# Altium PCB Boost_Conv_V1.0PCB.PcbDoc (part 3 of 3)
Units mm, origin at the board's own origin, x right, y up, seen from the top; angles counter-clockwise.
Board outline 213.5 x 150 mm, 2 copper layers (Top Layer, Bottom Layer); 53 components, 42 nets, 190 pads, 3434 vias.
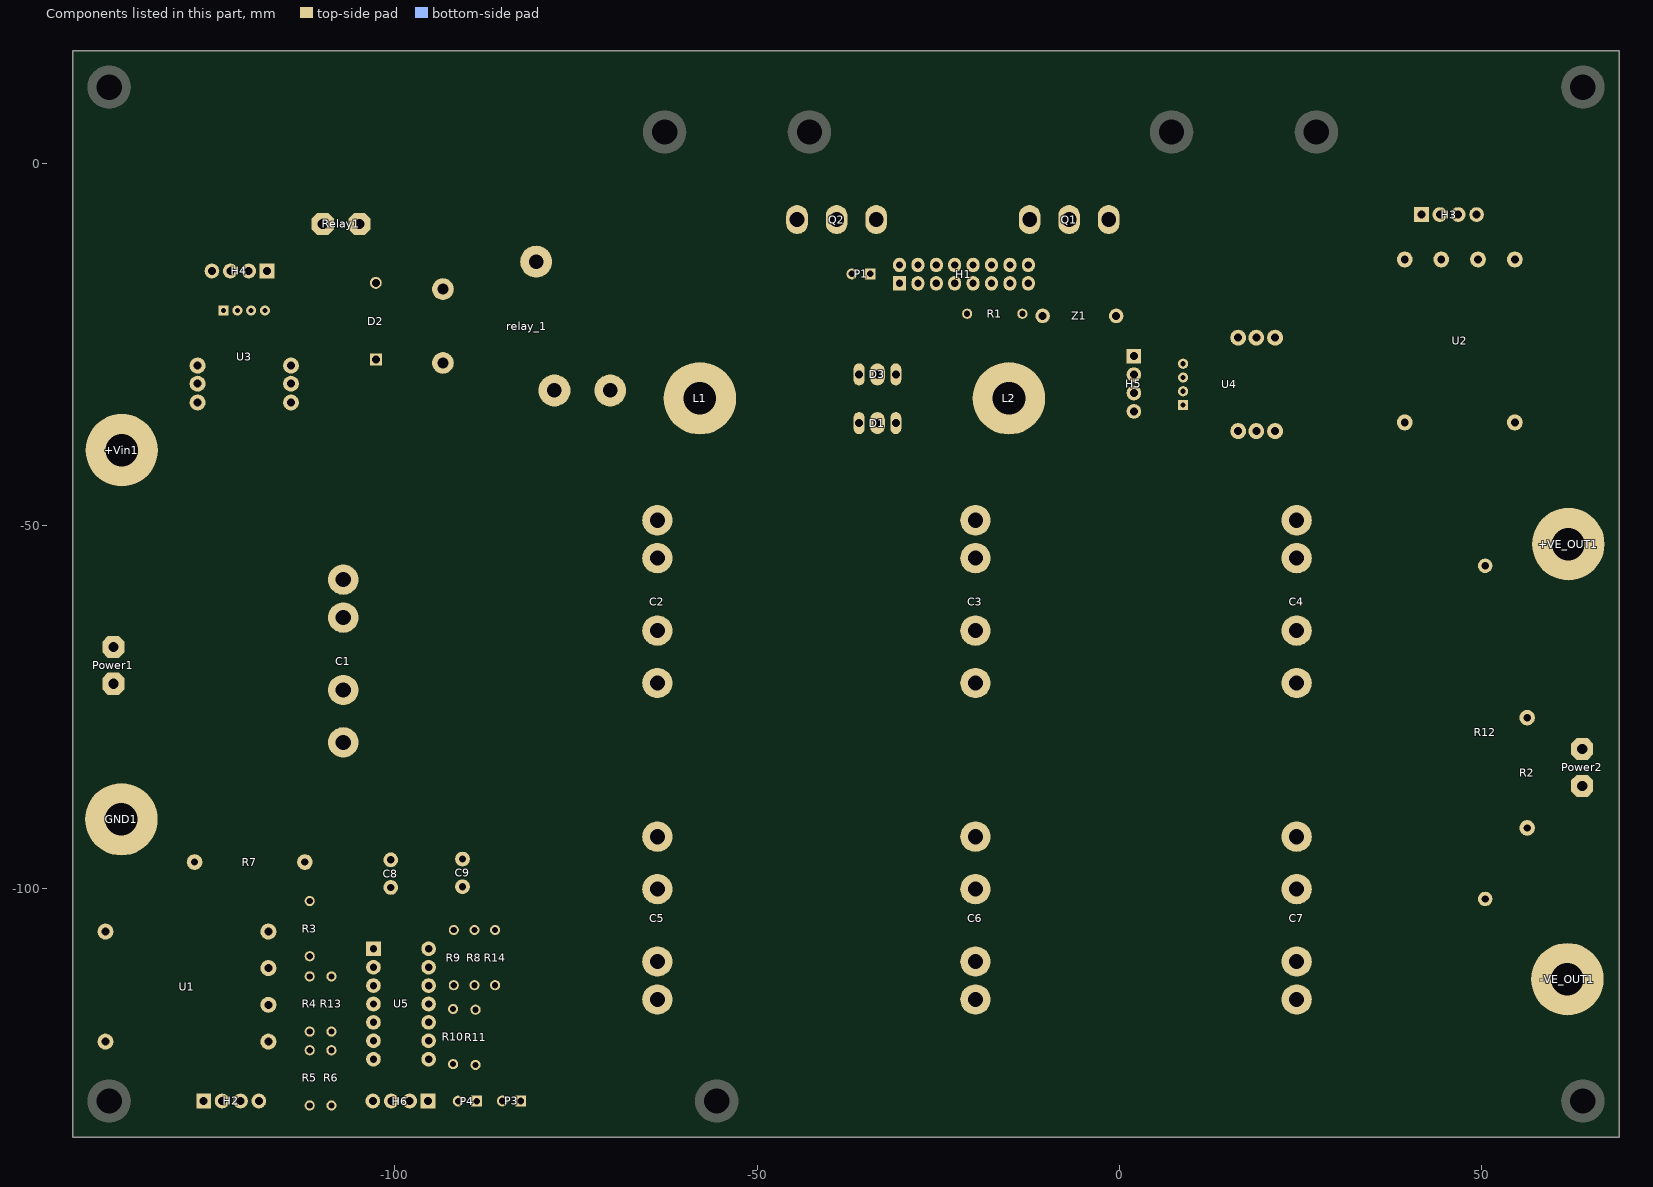
[diagram p3: the components of this part, seen from the top]

## Polygon pours and split planes (outlines as drawn) (continued)
NetC1_1 on Top Layer "Top Layer-NetC1_1" (solid, remove dead copper, pour order 43): -64.64,-33.803 -61.64,-36.803 -51.378,-36.803 -48.398,-33.903 -48.454,-25.303 -51.474,-22.326 -80.752,-22.541 -86.574,-29.422 -86.574,-31.703 -89.574,-34.703 -105.074,-34.703 -120.274,-49.903 -120.274,-62.703 -117.274,-65.703 -88.174,-65.703 -85.174,-62.703 -85.174,-42.203 -79.874,-36.903 -77.674,-36.903 -74.674,-33.903 -74.674,-28.503 -72.674,-26.503 -66.64,-26.503 -64.64,-28.503
Emitter on Top Layer "Top Layer-Emitter" (solid, remove dead copper, pour order 41): -75.675,-61.703 -78.682,-64.703 -78.686,-66.403 -81.693,-69.403 -128.074,-69.403 -130.174,-71.503 -141.092,-71.503 -143.174,-73.503 -143.174,-93.403 -141.092,-95.403 -134.274,-95.403 -128.474,-89.603 -81.874,-89.603 -78.748,-92.603 -78.767,-100.403 -75.774,-103.403 45.526,-103.403 48.526,-106.403 48.526,-117.703 51.526,-120.703 64.626,-120.703 67.626,-117.703 67.626,-88.203 64.626,-85.203 48.626,-85.203 45.626,-82.203 45.626,-64.703 42.626,-61.703
NetR7_1 on Top Layer "NETR7_1_L01_P010" (solid, remove dead copper, pour order 10): -140.092,-101.103 -143.092,-104.103 -143.092,-109.503 -139.474,-112.503 -129.774,-112.503 -120.074,-102.803 -120.074,-95.803 -123.074,-92.803 -127.074,-92.803 -135.374,-101.103
IP+in on Top Layer "IP+IN_L01_P007" (solid, remove dead copper, pour order 7): -143.092,-62.703 -140.092,-65.703 -127.774,-65.703 -124.774,-62.703 -124.774,-27.403 -127.374,-24.803 -140.092,-24.803 -143.092,-27.803
Cathode on Top Layer "CATHODE_L01_P005" (solid, remove dead copper, pour order 5): 45.326,-122.103 42.326,-125.103 -75.674,-125.103 -78.674,-122.103 -78.674,-110.003 -75.674,-107.003 42.326,-107.003 45.326,-110.003
Cathode on Top Layer "Top Layer-Cathode" (solid, remove dead copper, pour order 3): 27.926,-56.103 24.926,-59.103 -75.674,-59.103 -78.674,-56.103 -78.674,-42.465 -75.662,-39.453 9.726,-39.453 14.326,-34.853 24.926,-34.892 27.926,-37.903
Collector on Bottom Layer "Bottom Layer-Collector" (solid, remove dead copper, pour order 40): -5.41,-8.23 -8.357,-6.833 -8.611,-10.82 -8.611,-23.94 -9.574,-24.903 -17.774,-24.903 -21.274,-28.403 -21.274,-36.603 -18.274,-39.603 -9.774,-39.603 -4.687,-34.517
Emitter on Bottom Layer "EMITTER_L02_P038" (solid, remove dead copper, pour order 38): -143.074,-118.803 -141.074,-120.803 -127.774,-120.803 -124.774,-117.803 -124.774,-89.203 -128.774,-85.203 -139.474,-85.203 -143.074,-88.203
Cathode on Bottom Layer "Bottom Layer-Cathode" (solid, remove dead copper, pour order 54): -36.195,-105.436 -34.706,-106.934 46.944,-107.626 36.689,-117.881 -39.274,-117.703 -71.674,-117.703 -74.702,-114.704 -74.746,-110.003 -71.674,-107.003 -56.574,-107.003 -52.42,-102.997 -52.334,-61.603 -55.328,-58.603 -75.674,-58.603 -78.674,-56.103 -78.674,-42.403 -75.674,-39.31 -38.774,-39.396 -35.793,-42.403
IP+in on Bottom Layer "IP+IN_L02_P052" (solid, remove dead copper, pour order 52): -143.092,-62.703 -140.092,-65.703 -127.774,-65.703 -124.774,-62.703 -124.774,-27.403 -127.374,-24.803 -140.092,-24.803 -143.092,-27.803
Emitter on Bottom Layer "Bottom Layer-Emitter" (solid, remove dead copper, pour order 51): -38.915,-19.482 -37.343,-21.057 -25.719,-21.057 -25.732,-21.081 -23.927,-19.103 -12.48,-19.103 cw(c-12.479,-19.732) -11.851,-19.732 -11.851,-19.916 ccw(c-11.774,-19.916) -11.774,-19.992 -11.774,-21.855 cw(c-12.274,-21.855) -12.274,-22.355 -18.578,-22.355 -23.927,-27.703 -23.927,-60.903 29.318,-60.903 29.473,-35.093 33.633,-33.947 cw(c31.462,-36.457) 34.697,-37.195 45.126,-48.603 45.426,-59.103 45.426,-100.703 42.426,-103.703 -24.974,-103.703 -27.974,-100.703 -27.974,-26.294 -28.005,-26.219 ccw(c-28.97,-26.219) -28.97,-25.254 -42.626,-25.272 cw(c-42.626,-24.275) -43.623,-24.276 -43.623,-24.273 -43.583,-10.614 -35.949,-10.621 -35.91,-12.162 -38.91,-14.761
Emitter on Bottom Layer "EMITTER_L02_P049" (solid, remove dead copper, pour order 49): -0.976,0 0,-0.976 0,-4.26 -35.052,-4.312 -35.052,-0.976 -35.028,-0.976 -34.052,0
Emitter on Bottom Layer "Bottom Layer-Emitter 1" (solid, remove dead copper, pour order 31): -56.274,-100.403 -59.274,-103.362 -82.173,-103.045 -85.174,-99.953 -88.174,-96.903 -103.719,-96.903 -110.92,-85.203 -114.274,-85.203 -117.274,-82.203 -117.274,-72.403 -114.274,-69.403 -88.174,-69.403 -85.174,-66.403 -85.174,-64.603 -82.174,-61.603 -59.274,-61.603 -56.274,-64.603
Cathode on Bottom Layer "CATHODE_L02_P037" (solid, remove dead copper, pour order 37): 26.926,-56.103 25.226,-57.803 -20.374,-57.803 -22.074,-56.103 -22.074,-44.403 -20.074,-42.403 12.326,-42.403 14.326,-40.403 14.326,-36.603 16.126,-34.803 25.126,-34.803 26.926,-36.603
Emitter on Bottom Layer "EMITTER_L02_P036" (solid, remove dead copper, pour order 36): 67.736,-118.694 65.714,-120.716 65.666,-120.703 56.297,-120.703 54.326,-118.755 54.326,-87.207 56.315,-85.203 66.141,-85.203 67.642,-86.705 67.642,-86.73
IP-out on Bottom Layer "IP-OUT_L02_P035" (solid, remove dead copper, pour order 35): 53.742,-80.603 53.868,-80.603 51.902,-82.658 51.902,-80.603 49.252,-80.603 49.412,-82.689 47.342,-80.603 47.326,-80.603 47.326,-64.208 47.338,-64.203 50.338,-61.203 54.226,-61.203 56.226,-59.203 56.226,-45.803 56.25,-45.803 59.226,-42.828 64.627,-42.871 64.627,-42.896 67.626,-45.895 67.626,-78.603 65.626,-80.603
IP-out on Bottom Layer "IP-OUT_L02_P034" (solid, remove dead copper, pour order 34): -83.574,-114.803 -79.774,-112.403 ccw(c-84.774,-113.893) -82.292,-109.303 -84.278,-109.303
IP-in on Bottom Layer "IP-IN_L02_P033" (solid, remove dead copper, pour order 33): -79.174,-9.703 -77.187,-11.703 -77.274,-24.803 -85.174,-32.303 -85.174,-40.503 -87.174,-42.485 -115.674,-42.222 -117.674,-40.203 -117.674,-26.803 -115.674,-24.803 -113.274,-24.803 -111.251,-26.803 -111.196,-31.704 -109.174,-33.703 -94.074,-33.703 -85.174,-24.803 -85.174,-11.703 -83.174,-9.703
IP+in on Bottom Layer "IP+IN_L02_P032" (solid, remove dead copper, pour order 32): -143.192,-63.903 -140.892,-66.703 -124.774,-71.403 -124.774,-27.803 -127.774,-24.803 -140.092,-24.803 -143.192,-27.803

## Keep-outs
Keep-Out Layer:
  the board outline again, w0.2

## Silkscreen, mask and mechanical layers (free items; w line width, h text height)
Top Overlay:
  text "Boost Converter" at -128.918,9.13 h3
  text "Sigma Engineering" at -132.042,4.517 h3
  text "V1.0" at -112.799,-1.537 h3
  text "Vcc" at 42.385,-4.326 h2 r90
  text "Vo_S" at 47.354,-4.951 h2 r90
  text "VR_o" at 49.98,-5.013 h2 r90
  text "uGND" at 44.705,-5.185 h2 r90
  text "uGND" at -123.531,-8.047 h2 r270
  text "VR_C" at -117.899,-8.135 h2 r270
  text "VCC" at -126.158,-8.633 h2 r270
  text "C_S" at -120.222,-8.822 h2 r270
  text "PWM" at -26.474,-11.543 h2.5
  text "uGND" at -33.974,-11.573 h2.5
  text "G" at -18.774,-11.573 h2.5
  text "SGND" at -16.174,-11.573 h2.5
  text "+12" at -112.474,-15.203 h2.5
  text "GND" at -105.374,-15.273 h2.5
  text "VR_C" at -5.742,-26.429 h2
  text "C_S" at -5.055,-28.752 h2
  text "uGND" at -5.83,-32.061 h2
  text "VCC" at -5.244,-34.688 h2
  text "Vin" at -132.352,-63.988 h2.5 r270
  text "GND" at -132.322,-70.088 h2.5 r270
  text "GND" at -86.177,-132.1 h1.2
  text "Vo_S" at -83.377,-132.1 h1.2
  text "Vi_S" at -99.027,-132.199 h1.2
  text "Vcc" at -104.974,-132.291 h1.2
  text "uGND" at -102.515,-132.297 h1.2
  text "GND" at -96.177,-132.297 h1.2
  text "Vcc" at -126.107,-133.222 h1.2 r90
  text "Vi_S" at -121.004,-133.847 h1.2 r90
  text "VR_i" at -118.379,-133.909 h1.2 r90
  text "uGND" at -123.786,-134.081 h1.2 r90

## Text inside footprints (layer, text, board x,y; h text height)
C8: Top Overlay "+" at -101.437,-101.031 h1.52 r90
C9: Top Overlay "+" at -91.537,-100.921 h1.52 r90
H2: Top Overlay "1" at -128.446,-129.323 h1.52 r90
H3: Top Overlay "1" at 39.694,-6.927 h1.52 r90
H4: Top Overlay "1" at -115.626,-14.872 h1.52 r270
H5: Top Overlay "1" at 2.103,-24.531 h1.52
H6: Top Overlay "1" at -93.402,-129.48 h1.52 r270
relay_1: Top Overlay "Com" at -79.716,-20.496 h1.52 r90; Top Overlay "NC" at -69.816,-36.596 h1.52 r90; Top Overlay "NO" at -79.116,-35.796 h1.52 r90